# EAGLE board microbean (EAGLE 7.5.0)

Size 40.62 x 30.15 mm. Coordinates in mm from the lower left corner, seen from the top.
Outline: 0,0 40.62,0 40.62,30.15 0,30.15 0,0
Copper layers (1*16): Top 0.018mm / dielectric 1.55mm / Bottom 0.018mm
Design rules "eC_2Layer_PClass6_BaseCopperO18_eCDefault": minimum track width 0.15mm, minimum drill 0.35mm, track to track 0.15mm, track to pad 0.15mm, pad to pad 0.15mm, via to via 0.15mm, smd to smd 0mil, copper to edge 0.25mm, drill to drill 0.35mm, minimum pad ring 0.175mm, minimum via ring 0.125mm, stop-mask expansion 0mil, vias tented up to drill 0.45mm, thermal gap 0.2mm

## Footprints (pad centres in the part's own frame; a part is rotated, then mirrored left to right if it is on the bottom)
C0805 = smd 1.3 x 1.5: 1 -0.95,0; 2 0.95,0
E2-4 = drill 0.813 pad 1.27: + -1.016,0 | drill 0.813 pad 1.27 octagon: - 1.016,0
SMA = smd 2 x 2: A 2,0; C -2,0
SOT89 = smd 0.8 x 1.4: 1 -1.499,-1.981; 3 1.499,-1.981 | smd 0.8 x 1.9: 2 0,-1.727 | smd 2.032 x 3.65: 2@1 0,0.94
SO08 = smd 0.66 x 2.032: 1 -1.905,-3.073; 2 -0.635,-3.073; 3 0.635,-3.073; 4 1.905,-3.073; 5 1.905,3.073; 6 0.635,3.073; 7 -0.635,3.073; 8 -1.905,3.073
SO-18W = smd 0.762 x 1.143: 1 -5.08,-4.788; 2 -3.81,-4.788; 3 -2.54,-4.788; 4 -1.27,-4.788; 5 0,-4.788; 6 1.27,-4.788; 7 2.54,-4.788; 8 3.81,-4.788; 9 5.08,-4.788; 10 5.08,4.788; 11 3.81,4.788; 12 2.54,4.788; 13 1.27,4.788; 14 0,4.788; 15 -1.27,4.788; 16 -2.54,4.788; 17 -3.81,4.788; 18 -5.08,4.788
SCREWTERMINAL-3.5MM-2 = drill 1.2 pad 2.032 square: 1 0,0 | drill 1.2 pad 2.032: 2 3.5,0
1X04 = drill 1.016 pad 1.88: 1 0,0; 2 2.54,0; 3 5.08,0; 4 7.62,0
R0805 = smd 1.3 x 1.5: 1 -0.95,0; 2 0.95,0
1X05 = drill 1.016 pad 1.88: 1 0,0; 2 2.54,0; 3 5.08,0; 4 7.62,0; 5 10.16,0
MICRO-SWITCH = drill 1.016 long: 1 -3.251,2.261; 2 3.251,2.261; 3 -3.251,-2.261; 4 3.251,-2.261
P-LCC-2 = smd 4 x 4: A 0,2.75; C 0,-2.75

## Placement (x,y rotation side)
C1  [C0805]  12.7,22.86 0 top
C2  [C0805]  30.48,22.86 0 top
C3  [E2-4]  13.97,26.67 0 top
C4  [E2-4]  25.4,26.67 270 top
C5  [C0805]  10.16,11.43 0 top
D3  S1M  [SMA]  7.62,26.67 180 top
IC1  [SOT89]  20.32,25.4 180 top
IC2  MAX485ST3485  [SO08]  15.24,17.78 90 top
IC3  PIC16F1827SO  [SO-18W]  26.67,15.24 0 top
J1  [SCREWTERMINAL-3.5MM-2]  5.08,19.05 90 top
J2  [SCREWTERMINAL-3.5MM-2]  5.08,11.43 90 top
J3  [1X04]  30.48,27.94 0 top
J4  [1X04]  26.67,3.81 180 top
R1  [R0805]  17.78,10.16 0 top
U$1  ICSP-HEADER-5  [1X05]  36.83,11.43 90 top
U$2  PUSH-BUTTON  [MICRO-SWITCH]  34.29,5.08 0 top
U$3  LEDPLCC2  [P-LCC-2]  10.16,5.08 90 bottom

## Library data of the parts
C1-C5 IC1-IC3 J3 J4 R1 U$1-U$3 = custom
D3 = diode
J1 J2 = custom; PROD_ID: CONN-08399

## Nets
GND: C1.2 C2.2 C3.- C4.- C5.2 IC1.2 IC2.5 IC3.5 J1.1 U$1.3 U$2.1 U$3.C
N$1: D3.A J1.2
N$2: C1.1 C3.+ D3.C IC1.3
N$3: IC2.7 J2.1
N$5: IC2.6 J2.2
N$6: IC3.4 U$1.1 U$2.4
N$7: IC3.13 U$1.4
N$8: IC3.12 U$1.5
N$9: IC3.17 R1.2
N$10: R1.1 U$3.A
N$11: IC2.4 IC3.11
N$12: IC2.1 IC3.8
N$13: C2.1 C4.+ C5.1 IC1.1 IC2.8 IC3.14 U$1.2
N$14: IC3.1 J4.4
N$15: IC3.2 J4.3
N$16: IC3.3 J4.2
N$17: IC3.6 J4.1
N$18: IC3.7 J3.4
N$19: IC3.9 J3.3
N$20: IC3.10 J3.2
N$21: IC3.15 J3.1
N$23: IC2.2 IC2.3 IC3.18

## Tracks (layer width: path | path; a pad name or v marks a point on that pad's centre or on a via)
GND  (11 unrouted)
N$1  (1 unrouted)
N$2  (3 unrouted)
N$3  (1 unrouted)
N$5  (1 unrouted)
N$6  (2 unrouted)
N$7  (1 unrouted)
N$8  (1 unrouted)
N$9  (1 unrouted)
N$10  (1 unrouted)
N$11  (1 unrouted)
N$12  (1 unrouted)
N$13  (6 unrouted)
N$14  (1 unrouted)
N$15  (1 unrouted)
N$16  (1 unrouted)
N$17  (1 unrouted)
N$18  (1 unrouted)
N$19  (1 unrouted)
N$20  (1 unrouted)
N$21  (1 unrouted)
N$23  (2 unrouted)